# EAGLE board Board2_OBSOLETE (EAGLE 9.5.1)
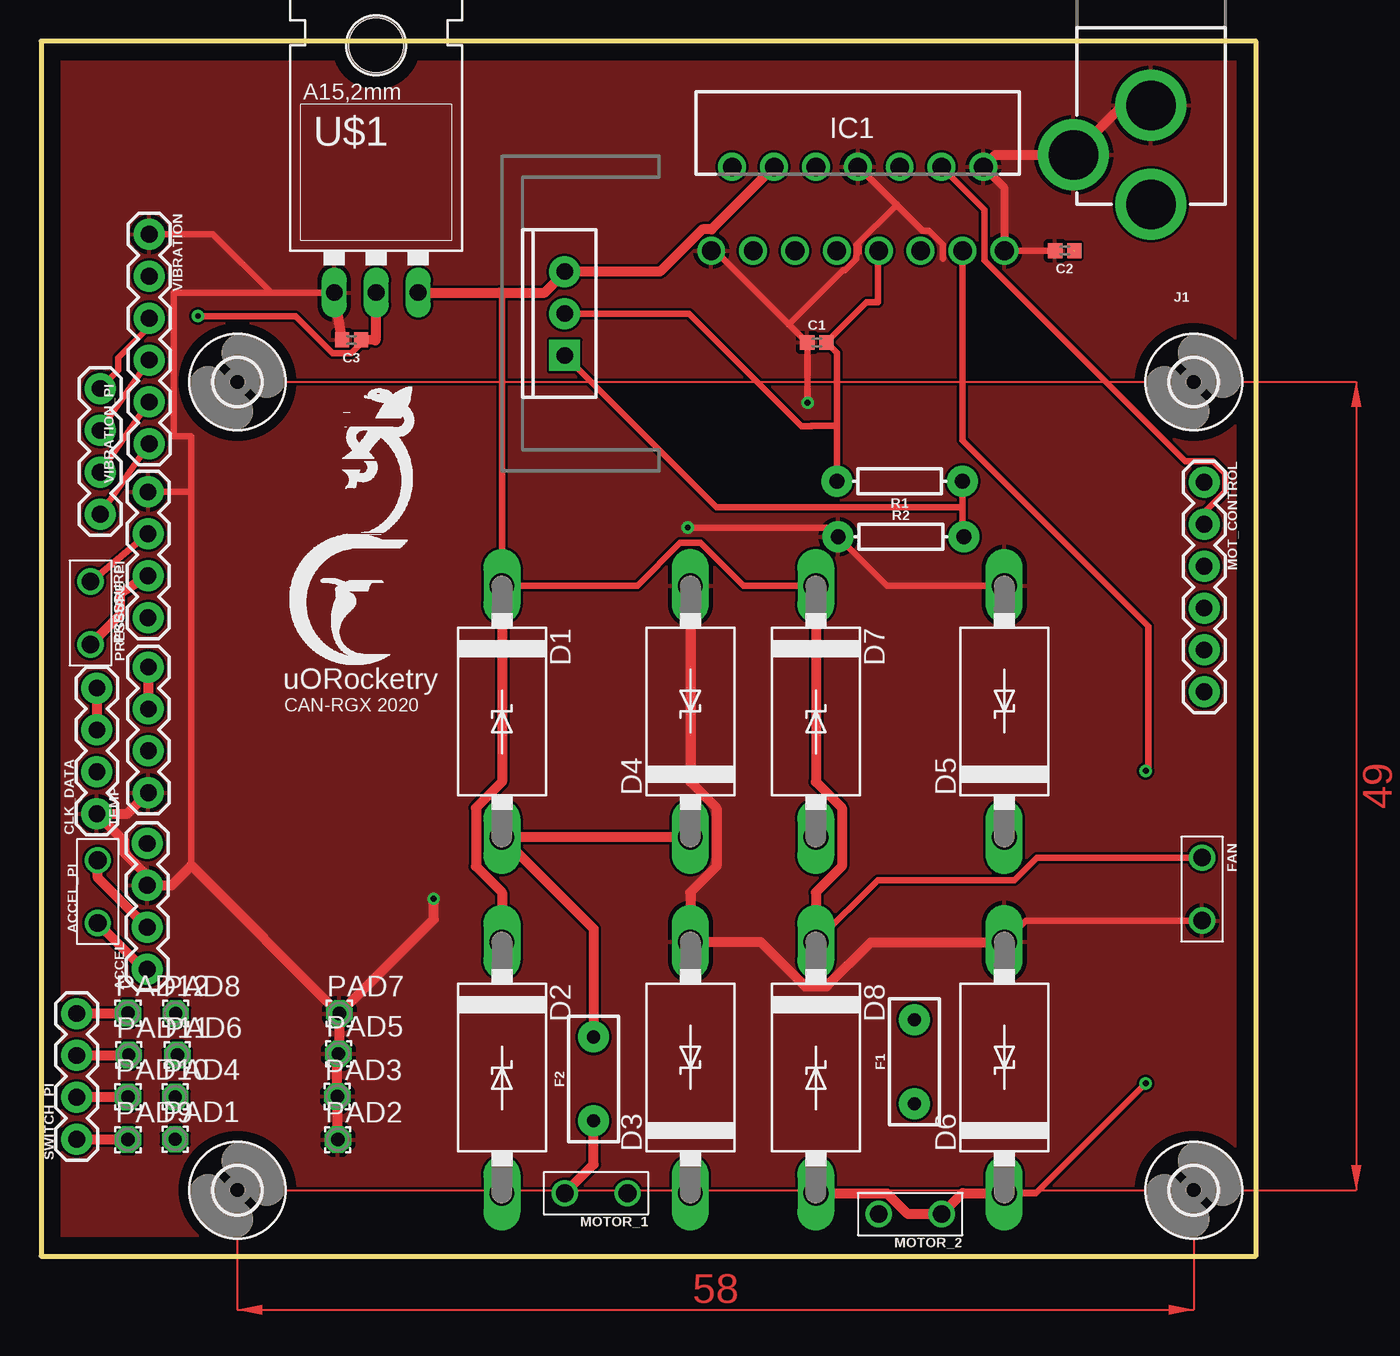
[diagram p0: board, top side]
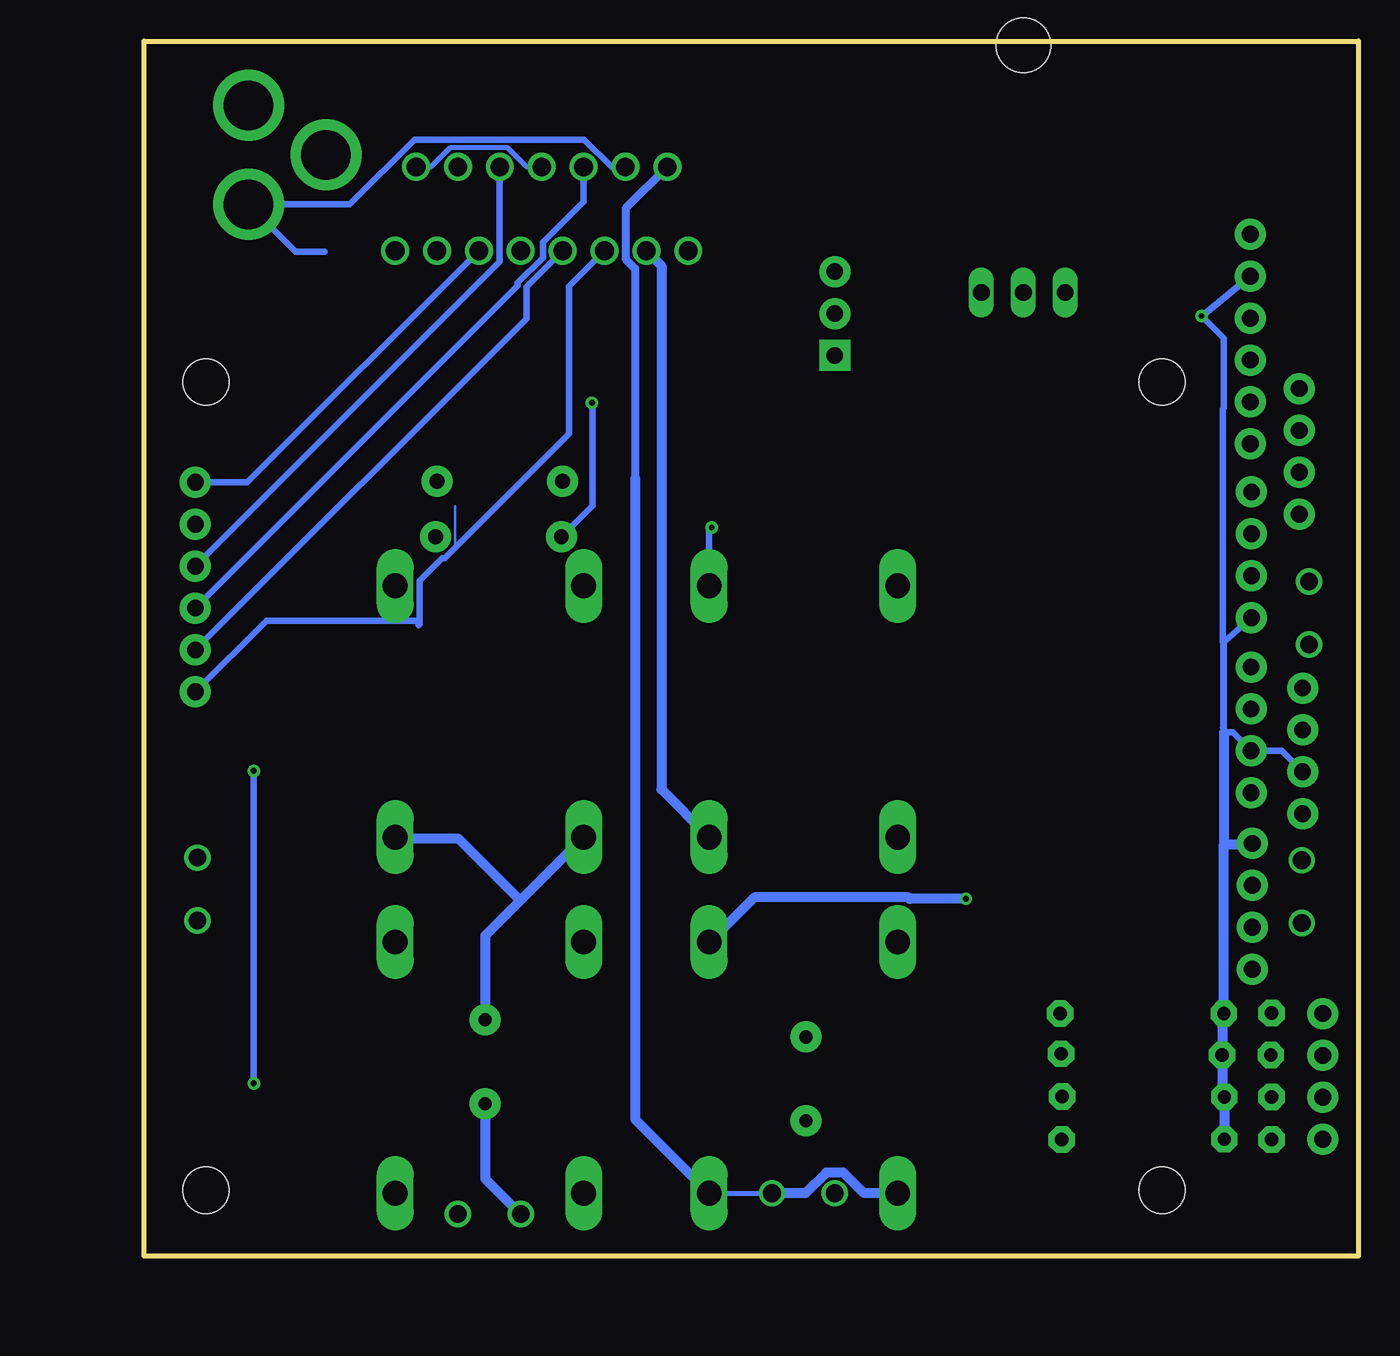
[diagram p1: board, bottom side, seen from below]

Size 73.66 x 73.66 mm. Coordinates in mm from the lower left corner, seen from the top.
Outline: 0,0 73.66,0 73.66,73.66 0,73.66 0,0
Copper layers (1*16): Top 0.035mm / dielectric 1.5mm / Bottom 0.035mm
Design rules "default": minimum track width 6mil, minimum drill 0.35mm, track to track 6mil, track to pad 6mil, pad to pad 6mil, via to via 6mil, smd to smd 6mil, copper to edge 40mil, drill to drill 6mil, minimum pad ring 10mil, minimum via ring 8mil, stop-mask expansion 4mil, vias tented up to drill 0mil, thermal gap 10mil

## Footprints (pad centres in the part's own frame; a part is rotated, then mirrored left to right if it is on the bottom)
1X04 = drill 1.016 pad 1.88: 1 0,0; 2 2.54,0; 3 5.08,0; 4 7.62,0
1X02_BIG = drill 1.067: P$1 0,0; P$2 3.81,0
0402 = smd 0.85 x 0.9: 1 -0.58,0; 2 0.58,0
C4111-15 = drill 1.499 long: A 7.62,0; C -7.62,0
PTH = drill 0.8 pad 1.88: P$1 -2.54,0; P$2 2.54,0
MULTIWATT15V_1 = drill 1.13 pad 1.63: 1 -8.89,-5.08; 2 -7.62,0; 3 -6.35,-5.08; 4 -5.08,0; 5 -3.81,-5.08; 6 -2.54,0; 7 -1.27,-5.08; 8 0,0; 9 1.27,-5.08; 10 2.54,0; 11 3.81,-5.08; 12 5.08,0; 13 6.35,-5.08; 14 7.62,0; 15 8.89,-5.08
POWER_JACK_PTH = drill 2.997 pad 4.318: GND 0,7.7; GNDBREAK 4.7,10.7; PWR 0,13.7
1X06 = drill 1.016 pad 1.88: 1 0,0; 2 2.54,0; 3 5.08,0; 4 7.62,0; 5 10.16,0; 6 12.7,0
1,6/0,8 = drill 0.813 pad 1.6 octagon: 1 0,0
AXIAL-0.3 = drill 0.9 pad 1.88: P$1 -3.81,0; P$2 3.81,0
TO220-ADJ = drill 1 pad 1.88 square: ADJ -2.54,0 | drill 1 pad 1.88: IN 2.54,0; OUT 0,0
78XXL = drill 1.016 long: GND 0,-3.81; IN -2.54,-3.81; OUT 2.54,-3.81 | hole 3.302: 0,11.176
2,8 = hole 2.8: 0,0

## Placement (x,y rotation side)
ACCEL  [1X04]  6.43,17.4 90 top
ACCEL_PI  [1X02_BIG]  3.43,20.19 90 top
C1  0.1uF  [0402]  47.04,55.4 0 top
C2  0.1uF  [0402]  62.08,60.96 180 top
C3  0.1uF  [0402]  18.82,55.55 180 top
CLK_DATA  [1X04]  3.38,26.82 90 top
D1  [C4111-15]  27.94,33.02 270 top
D2  [C4111-15]  27.94,11.43 270 top
D3  [C4111-15]  39.37,11.43 90 top
D4  [C4111-15]  39.37,33.02 90 top
D5  [C4111-15]  58.42,33.02 90 top
D6  [C4111-15]  58.42,11.43 90 top
D7  [C4111-15]  46.99,33.02 270 top
D8  [C4111-15]  46.99,11.43 270 top
F1  65V/2A  [PTH]  52.96,11.79 90 top
F2  65V/2A  [PTH]  33.5,10.74 90 top
FAN  [1X02_BIG]  70.41,24.16 270 top
IC1  L298N  [MULTIWATT15V_1]  49.53,66.04 0 top
J1  POWER_JACK  [POWER_JACK_PTH]  67.31,77.47 180 top
MOT_CONTROL  [1X06]  70.54,46.91 270 top
MOTOR_1  [1X02_BIG]  35.56,3.81 180 top
MOTOR_2  [1X02_BIG]  54.61,2.54 180 top
PAD1  [1,6/0,8]  8.13,7.09 0 top
PAD2  [1,6/0,8]  17.98,7.06 0 top
PAD3  [1,6/0,8]  17.96,9.68 0 top
PAD4  [1,6/0,8]  8.13,9.65 0 top
PAD5  [1,6/0,8]  18.03,12.27 0 top
PAD6  [1,6/0,8]  8.26,12.19 0 top
PAD7  [1,6/0,8]  18.08,14.71 0 top
PAD8  [1,6/0,8]  8.15,14.71 0 top
PAD9  [1,6/0,8]  5.26,7.06 0 top
PAD10  [1,6/0,8]  5.26,9.65 0 top
PAD11  [1,6/0,8]  5.31,12.19 0 top
PAD12  [1,6/0,8]  5.26,14.73 0 top
PRESSURE  [1X04]  6.48,38.71 90 top
PRESSURE_PI  [1X02_BIG]  3,40.89 270 top
R1  240  [AXIAL-0.3]  52.07,46.99 180 top
R2  720  [AXIAL-0.3]  52.15,43.61 0 top
SWITCH_PI  [1X04]  2.16,7.09 90 top
TEMP  [1X04]  6.5,28.09 90 top
U1  V_REG_317SINK  [TO220-ADJ]  31.75,57.15 90 top
U$1  V_REG_LD1117VXX  [78XXL]  20.32,62.23 0 top
U$2  [2,8]  11.9,53 0 top
U$3  [2,8]  69.9,4 0 top
U$4  [2,8]  11.9,4 180 top
U$5  [2,8]  69.9,53 0 top
VIBRATION  [1X06]  6.55,61.95 270 top
VIBRATION_PI  [1X04]  3.58,52.6 270 top

## Library data of the parts
ACCEL CLK_DATA PRESSURE SWITCH_PI TEMP VIBRATION_PI = SparkFun-Connectors; PROD_ID: CONN-09696
ACCEL_PI FAN MOTOR_1 MOTOR_2 PRESSURE_PI = SparkFun-Connectors
C1-C3 = SparkFun-Capacitors; PROD_ID: CAP-12416
D1-D8 = adafruit
F1 F2 = SparkFun-Fuses; PROD_ID: RES-08490
IC1 = SamacSys_Parts; DESCRIPTION: L298N, Stepper Motor Controller, Dual Full Bridge Motor Driver, 4.8 46 V, 15-Pin MULTIWATT V; HEIGHT: mm; MANUFACTURER_NAME: Magnatec; MANUFACTURER_PART_NUMBER: L298N; RS_PART_NUMBER: 0636384; RS_PRICE-STOCK: http://uk.rs-online.com/web/p/products/0636384
J1 = SparkFun-Connectors; PROD_ID: CONN-08197
MOT_CONTROL VIBRATION = SparkFun-Connectors; PROD_ID: CONN-08437
PAD1-PAD12 = wirepad
R1 R2 = SparkFun-Resistors
U1 U$1 = SparkFun-IC-Power
U$2-U$5 = holes

## Nets
A_SCL: ACCEL.2 ACCEL_PI.P$2
A_SDA: ACCEL.1 ACCEL_PI.P$1
CLK_DATA: CLK_DATA.3 CLK_DATA.4
GND: ACCEL.3 C1.1 C2.2 C3.2 CLK_DATA.1 D3.A D4.A D5.A D6.A FAN.P$2 IC1.1 IC1.8 IC1.14 IC1.15 J1.GND J1.GNDBREAK PAD2.1 PAD3.1 PAD5.1 PAD7.1 PRESSURE.4 R2.P$1 TEMP.1 U$1.IN VIBRATION.1
MOT1_EN: IC1.6 MOT_CONTROL.4
MOT1_IN1: IC1.5 MOT_CONTROL.6
MOT1_IN2: IC1.7 MOT_CONTROL.5
MOT1_OUT1: D2.A D3.C IC1.2 MOTOR_1.P$1
MOT1_OUT2: D1.A D4.C F2.P$2 IC1.3
MOT2_EN: IC1.11 MOT_CONTROL.1
MOT2_IN1: IC1.10 MOT_CONTROL.3
MOT2_IN2: IC1.12 MOT_CONTROL.2
MOT2_OUT1: D6.C D8.A IC1.13 MOTOR_2.P$1
MOT2_OUT2: D5.C D7.A F1.P$2
N$1: F2.P$1 MOTOR_1.P$2
N$2: F1.P$1 MOTOR_2.P$2
N$3: C1.2 IC1.9 R1.P$2 U1.OUT
N$4: R1.P$1 R2.P$2 U1.ADJ
N$11: PAD10.1 SWITCH_PI.2
N$12: PAD9.1 SWITCH_PI.1
N$13: PAD11.1 SWITCH_PI.3
N$14: PAD12.1 SWITCH_PI.4
P_SCL: PRESSURE.2 PRESSURE_PI.P$2
P_SDA: PRESSURE.3 PRESSURE_PI.P$1
TEMP_DATA: TEMP.3 TEMP.4
V_CSO: VIBRATION.3 VIBRATION_PI.1
V_DO: VIBRATION.4 VIBRATION_PI.2
V_RST: VIBRATION.5 VIBRATION_PI.3
V_SCL: VIBRATION.6 VIBRATION_PI.4
VCC_12: C2.1 D1.C D2.C D7.C D8.C FAN.P$1 IC1.4 J1.PWR U1.IN U$1.OUT
VCC_33: ACCEL.4 C3.1 CLK_DATA.2 PAD1.1 PAD4.1 PAD6.1 PAD8.1 PRESSURE.1 TEMP.2 U$1.GND VIBRATION.2

## Tracks (layer width: path | path; a pad name or v marks a point on that pad's centre or on a via)
A_SCL
  Top 0.6: ACCEL.2 3.43,22.94 ACCEL_PI.P$2
A_SDA
  Top 0.6: ACCEL_PI.P$1 6.22,17.4 ACCEL.1
CLK_DATA
  Top 0.6: CLK_DATA.4 CLK_DATA.3
GND  (via drill 0.35)
  Top 0.152: 13.99,58.37 17.68,58.37 U$1.IN | 45.26,56.39 40.69,60.96 IC1.1 | 45.26,56.39 46.33,55.32 46.43,55.4 C1.1 | 54.56,60.66 54.56,61.27 51.97,63.86 | 51.97,63.86 49.84,65.99 49.53,65.99 IC1.8 | 45.26,56.39 45.36,56.49 49.68,60.81 49.68,61.57 51.8,63.69 51.97,63.86 | D3.A 39.4,19.05 43.89,19.05 46.48,16.46 | 58.34,19.02 58.37,19.05 D6.A | 39.47,40.69 D4.A | R2.P$1 48.39,43.56 | 10.41,61.95 13.99,58.37 | 13.99,58.37 8.03,58.37 8.03,49.84 | 17.98,9.68 PAD3.1 | 17.96,9.7 17.96,12.19 PAD5.1 18.03,12.37 18.03,14.66 18.07,14.69 | 18.07,14.69 PAD7.1 | 9.09,23.67 18.07,14.69 | 5.23,26.82 5.26,26.85 | 23.8,21.41 v23.8,21.67
  Top 0.4: U$1.IN 13.97,58.42 | 13.97,58.42 8.03,58.42 8.03,49.84 8.03,49.71 9.09,49.71 9.09,46.35 | 9.09,46.35 9.09,23.67 | PRESSURE.4 9.09,46.35 | VIBRATION.1 10.41,61.95 13.97,58.42 | IC1.1 40.9,60.96 C1.1 46.48,55.38 v46.48,51.74 | D5.A 51.31,40.64 R2.P$1 47.78,44.17 v39.22,44.17 | IC1.8 53.41,62.16 53.84,62.16 54.68,61.32 54.68,60.46 | 45.36,56.49 48.63,59.76 48.76,59.76 49.46,60.46 49.46,61.32 51.8,63.66 51.8,63.69 | D6.A 59.72,20.34 FAN.P$2 | C2.2 IC1.15
  Top 0.5: IC1.14 58.42,64.77 IC1.15
  Top 0.6: D4.A 39.37,28.75 40.95,27.18 40.95,23.62 39.37,22.05 39.37,19.07 39.4,19.05 | D3.A 43.64,19.05 46.34,16.35 47.64,16.35 50.32,19.02 58.34,19.02 | PAD7.1 23.8,20.42 23.8,21.41 | PAD7.1 18.09,12.32 17.96,12.19 | PAD3.1 17.96,9.7 | 17.96,9.7 17.96,12.29 18.03,12.37 | PAD2.1 17.98,9.68 17.96,9.7 | PAD7.1 9.12,23.67 9.09,23.67 7.9,22.48 ACCEL.3 6.43,23.05 5.03,24.44 5.03,25.17 CLK_DATA.1 5.23,26.82 | 5.26,26.85 TEMP.1 | C3.2 U$1.IN | IC1.14 57.88,66.77 J1.GNDBREAK 65.61,69.77 J1.GND
  Bottom 0.152: 39.32,19.05 D3.A
  Bottom 0.305: IC1.8 50.44,66.04 51.59,67.19 55.09,67.19 56.24,66.04 IC1.14
  Bottom 0.4: R2.P$1 46.46,45.49 46.46,51.74 v46.48,51.74 | D4.A 39.37,44.09 39.27,44.2 39.24,44.2 v39.22,44.17
  Bottom 0.6: v23.8,21.67 27.2,21.67 27.29,21.75 36.62,21.75 39.32,19.05
  pour Top: 0,0.08 73.58,0.08 73.63,0.13 73.63,73.69 73.58,73.74 0.03,73.74 -0.03,73.69 -0.03,0.25 0,0.23
MOT1_EN
  Bottom 0.4: MOT_CONTROL.4 51,58.83 51,59 49.46,60.54 49.46,61.46 46.99,63.93 IC1.6
MOT1_IN1
  Bottom 0.152: 54.79,45.47 54.79,43.13 57,40.92 57,38.53
  Bottom 0.4: MOT_CONTROL.6 66.22,38.53 57,38.53 57,38.25 56.94,38.31 56.94,40.96 55.58,42.32 55.42,42.32 47.88,49.86 47.88,58.8 IC1.5
MOT1_IN2
  Bottom 0.4: IC1.7 50.44,58.78 50.44,56.84 MOT_CONTROL.5
MOT1_OUT1
  Bottom 0.152: 39.47,3.81 D3.C
  Bottom 0.305: D3.C 35.74,3.81
  Bottom 0.5: 43.87,47.14 43.87,59.88 44.43,60.44 44.43,63.52 IC1.2
  Bottom 0.6: 35.74,3.81 MOTOR_1.P$1 33.52,3.81 32.27,5.06 31.23,5.06 29.98,3.81 D2.A | D3.C 43.87,8.31 43.87,47.14
MOT1_OUT2
  Top 0.6: F2.P$2 33.5,19.84 D1.A D4.C
  Bottom 0.152: 43.13,60.96 IC1.3 | 39.47,25.45 D4.C
  Bottom 0.6: D4.C 42.27,28.3 42.27,60.05 IC1.3
MOT2_EN
  Bottom 0.4: MOT_CONTROL.1 67.39,46.91 IC1.11
MOT2_IN1
  Bottom 0.4: MOT_CONTROL.3 52.07,60.3 IC1.10
MOT2_IN2
  Top 0.4: MOT_CONTROL.2 70.54,45.09 71.83,46.38 71.83,47.45 71.07,48.21 69.38,48.21 57.22,60.37 57.22,63.43 IC1.12
MOT2_OUT1  (via drill 0.35)
  Top 0.4: IC1.13 55.88,49.45 67.16,38.18 67.16,29.62 v66.98,29.44 v66.99,29.43 | v66.99,10.48 60.33,3.81 D6.C
  Top 0.6: D6.C 55.88,3.81 MOTOR_2.P$1 52.57,2.54 51.32,3.79 47.01,3.79 D8.A
  Bottom 0.4: v66.99,29.43 66.99,10.6 66.93,10.54 v66.99,10.48
MOT2_OUT2
  Bottom 0.152: D7.A 50.75,21.64 50.81,21.7 | 50.81,21.7 54.41,25.3 58.37,25.3 D5.C | F1.P$2 52.96,19.56 50.89,21.63 50.81,21.7
  Bottom 0.6: D7.A 52.96,19.43 F1.P$2 | 50.89,21.63 54.56,25.3 58.37,25.3
N$1
  Top 0.6: MOTOR_1.P$2 33.5,5.56 F2.P$1
N$2
  Bottom 0.6: F1.P$1 52.96,4.7 MOTOR_2.P$2
N$3
  Top 0.152: 47.7,55.37 C1.2
  Top 0.4: 48.26,50.34 48.26,54.76 C1.2 50.04,57.82 50.75,57.82 50.75,60.91 IC1.9 | 48.26,50.34 R1.P$2 | 48.26,50.34 46.73,50.34 46.71,50.32 46.1,50.32 39.28,57.15 U1.OUT
N$4
  Top 0.4: R1.P$1 55.88,45.41 | 55.88,45.41 55.88,43.69 R2.P$2 | U1.ADJ 40.95,45.41 55.88,45.41
N$11
  Top 0.6: PAD10.1 5.23,9.63 SWITCH_PI.2
N$12
  Top 0.6: SWITCH_PI.1 5.23,7.09 PAD9.1
N$13
  Top 0.6: SWITCH_PI.3 5.28,12.17 PAD11.1
N$14
  Top 0.6: PAD12.1 5.23,14.71 SWITCH_PI.4
P_SCL
  Top 0.152: 3.05,37.13 PRESSURE_PI.P$2 | 4.78,40.06 4.78,40.16 4.8,40.18 | 6.45,41.25 PRESSURE.2
  Top 0.6: PRESSURE_PI.P$2 4.78,38.86 4.78,40.06 | 4.8,40.18 6.45,41.25
P_SDA
  Top 0.152: 3.05,40.95 PRESSURE_PI.P$1
  Top 0.4: PRESSURE_PI.P$1 PRESSURE.3
TEMP_DATA
  Top 0.6: TEMP.4 TEMP.3
V_CSO
  Top 0.4: VIBRATION.3 6.55,56.36 4.68,54.48 4.68,53.7 VIBRATION_PI.1
V_DO
  Top 0.4: VIBRATION.4 VIBRATION_PI.2
V_RST
  Top 0.4: VIBRATION.5 VIBRATION_PI.3
V_SCL
  Top 0.4: VIBRATION_PI.4 VIBRATION.6
VCC_12  (1 unrouted)
  Top 0.152: 27.89,58.52 30.63,58.52 31.7,59.59 U1.IN 31.85,59.74 37.19,59.74 | 27.89,58.52 22.86,58.52 U$1.OUT | 44.35,65.99 IC1.4 | 27.89,58.52 27.89,40.69 D1.C
  Top 0.4: FAN.P$1 60.39,24.16 59.03,22.8 50.74,22.8 D8.C | 27.81,58.42 27.94,58.29 D1.C 36.16,40.64 38.76,43.24 39.98,43.24 42.58,40.64 D7.C
  Top 0.6: D1.C 27.94,28.75 26.36,27.18 26.36,23.62 27.94,22.05 D2.C | D7.C 46.99,28.75 48.57,27.18 48.57,23.62 46.99,22.05 D8.C | U$1.OUT 27.81,58.42 30.53,58.42 31.85,59.74 | IC1.4 40.67,62.26 40.1,62.26 37.53,59.69 U1.IN
  Bottom 0.4: IC1.4 45.29,66.04 46.95,67.7 57.24,67.7 61.17,63.77 J1.PWR 64.45,60.91 62.69,60.91
VCC_33  (via drill 0.35)
  Top 0.152: 6.55,59.38 VIBRATION.2 | 20.27,55.52 20.27,55.58
  Top 0.4: v9.5,57 15.42,57 17.67,54.75 18.81,54.75 19.59,55.52 20.27,55.52
  Top 0.6: C3.1 20.27,55.58 | U$1.GND 20.27,55.52
  Bottom 0.152: 8.33,32.03 8.31,32.05 8.31,37.24 8.23,37.24 8.13,37.24 | TEMP.2 6.55,30.63 | 8.33,24.99 8.31,24.97 8.15,24.97 | 6.48,24.97 ACCEL.4 | PAD8.1 8.33,14.88
  Bottom 0.4: VIBRATION.2 v9.5,57 8.14,55.64 8.14,51.44 8.23,51.36 8.23,37.24 | PRESSURE.1 8.13,37.24 8.15,37.24 8.15,31.75 7.62,31.75 TEMP.2 | CLK_DATA.2 4.65,30.63 6.55,30.63
  Bottom 0.6: 8.15,24.97 PAD8.1 8.26,14.61 PAD6.1 8.26,9.78 PAD4.1 PAD1.1 | 8.15,24.97 6.48,24.97 | 8.15,31.75 8.15,24.97
(copper drawn outside any net)
  shapes: Top area x2

## Text on the board
tPlace: uORocketry | CAN-RGX 2020